# Altium PCB 8_CHANNEL_RELAY_CARD.PcbDoc
Units mm, origin at the board's own origin, x right, y up, seen from the top; angles counter-clockwise.
Board outline 185.55 x 71.9 mm, 2 copper layers (Top Layer, Bottom Layer); 39 components, 51 nets, 138 pads, 0 vias.
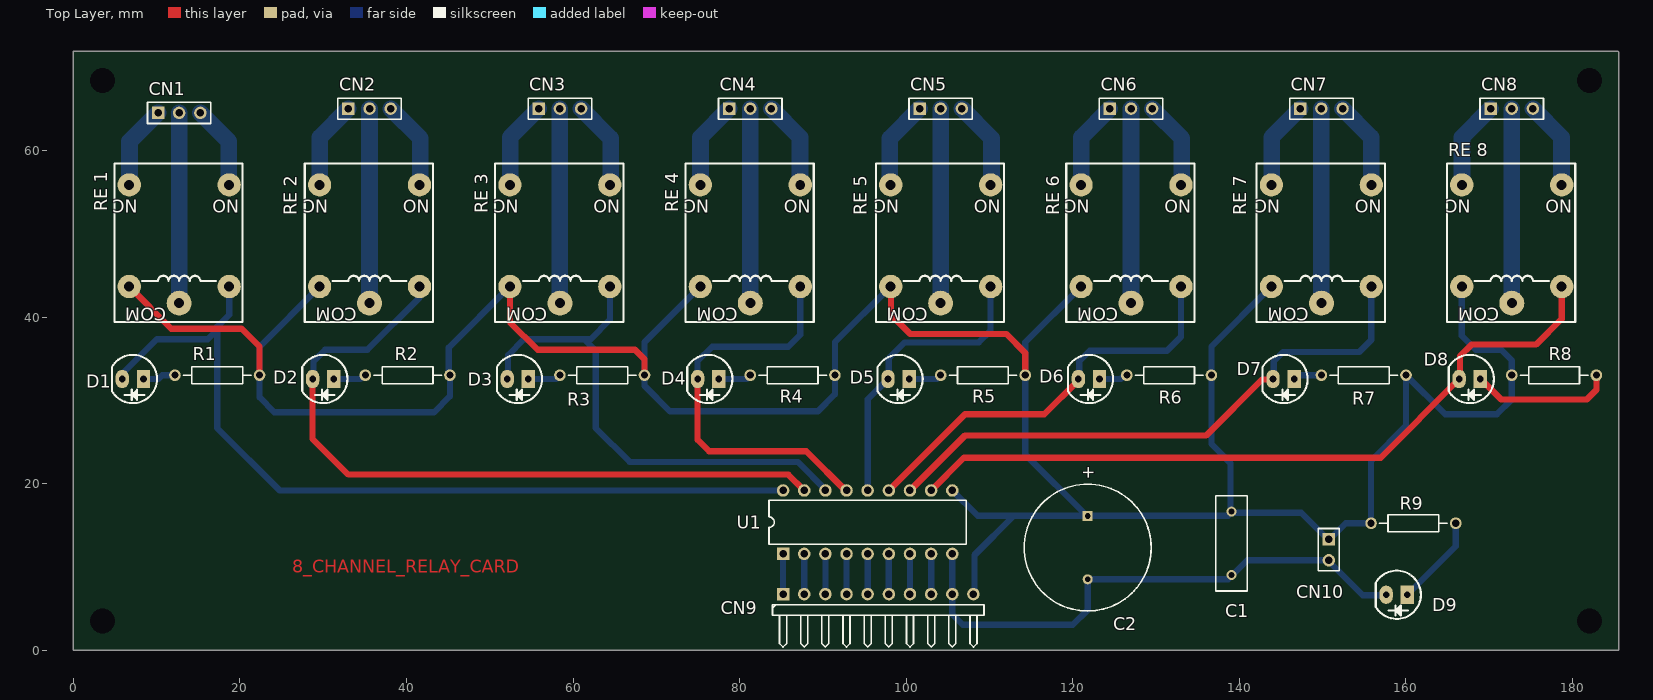
[diagram p0: Top Layer view]
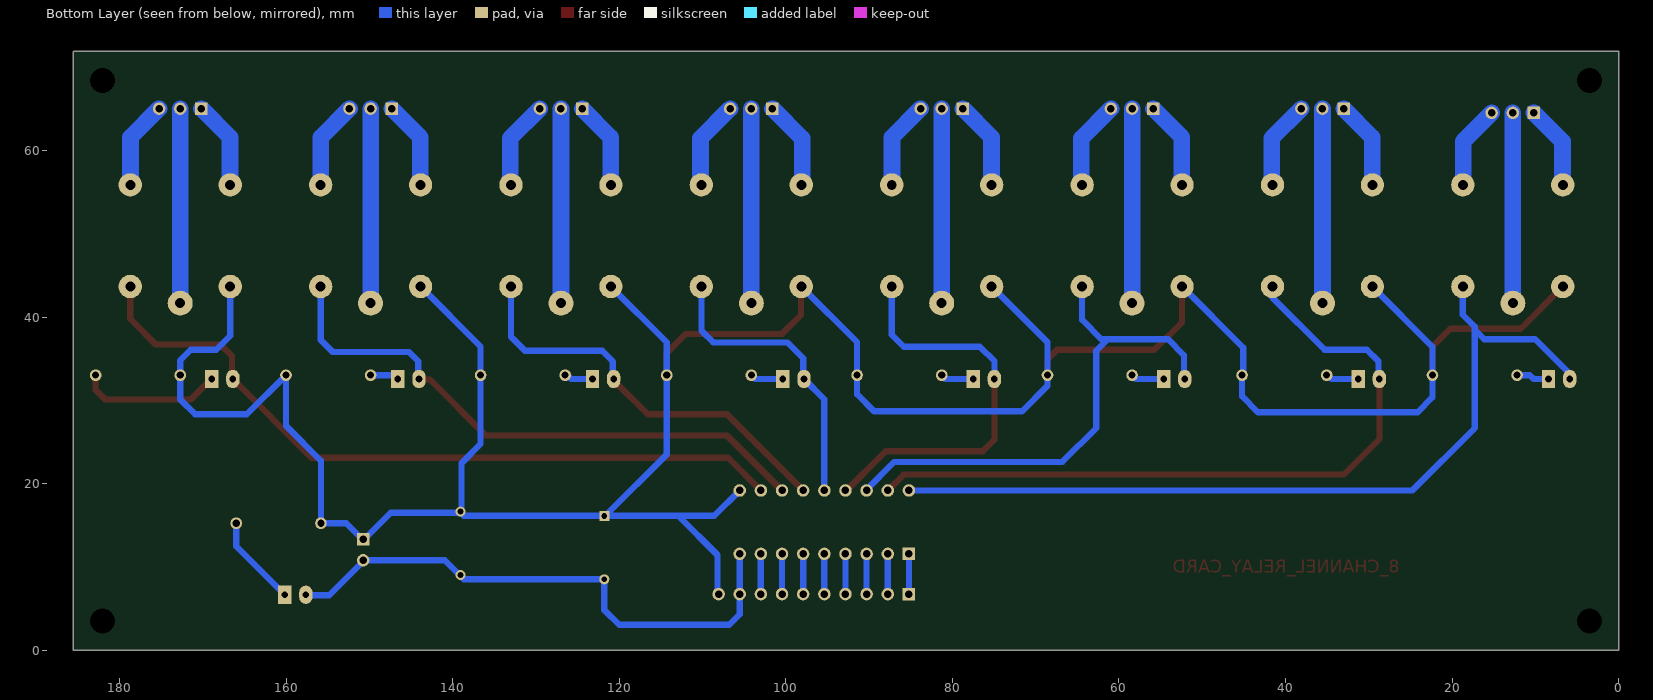
[diagram p1: Bottom Layer view, seen from below]

## Layer stack, top to bottom
Top Layer: signal copper 0.0356
Dielectric: dielectric 0.32, FR-4, Dk 4.8
Bottom Layer: signal copper 0.0356

## Board outline
0,0 0,71.9 185.529,71.9 185.547,71.882 185.547,0

## Design rules (kind name [scope] priority, off if disabled: settings)
Clearance [All] p1: gap=0.254
PolygonConnect [All] p1: connectstyle=Relief reliefconductorwidth=0.254 reliefentries=4 polygonreliefangle="90 Angle"
RoutingVias [All] p1: holewidth=0.711 width=1.27 viastyle="Through Hole" minholewidth=0.711 minwidth=1.27 maxholewidth=0.711 maxwidth=1.27
SilkscreenOverComponentPads [All] p1: minsilkscreentomaskgap=0.254
SolderMaskExpansion [All] p1: expansion=0.102
Width [All] p1: maxlimit=2 minlimit=0.75 preferedwidth=0.75
27 further rules are at their usual default settings.

## Components (designator, comment, footprint, x,y, rotation, side; value= is the part's Value field where it differs from the comment)
C1 "Cap" RAD-0.3 139.065,12.827 r90 top
C2 "Cap Pol1" RB7.6-15 121.793,12.319 r90 top
CN1 "PBT3" HDR1X3 10.16,64.516 r0 top
CN2 "PBT3" HDR1X3 33.02,65.024 r0 top
CN3 "PBT3" HDR1X3 55.88,65.024 r0 top
CN4 "PBT3" HDR1X3 78.74,65.024 r0 top
CN5 "PBT3" HDR1X3 101.6,65.024 r0 top
CN6 "PBT3" HDR1X3 124.46,65.024 r0 top
CN7 "PBT3" HDR1X3 147.32,65.024 r0 top
CN8 "PBT3" HDR1X3 170.18,65.024 r0 top
CN9 "SIP10" HDR1X10H 85.217,6.731 r0 top
CN10 "SUPPLY INPUT" HDR1X2 150.749,13.335 r270 top
D1 "RED LED" 5mm_LED 7.112,32.512 r180 top
D2 "GREEN LED" 5mm_LED 29.972,32.512 r180 top
D3 "RED LED" 5mm_LED 53.34,32.512 r180 top
D4 "GREEN LED" 5mm_LED 76.2,32.512 r180 top
D5 "RED LED" 5mm_LED 99.06,32.512 r180 top
D6 "GREEN LED" 5mm_LED 121.92,32.512 r180 top
D7 "RED LED" 5mm_LED 145.288,32.512 r180 top
D8 "GREEN LED" 5mm_LED 167.64,32.512 r180 top
D9 "RED LED" 5mm_LED 158.877,6.604 r180 top
R1 "1K" "Res 0.25W" 17.272,33.02 r0 top
R2 "1K" "Res 0.25W" 40.132,33.02 r0 top
R3 "1K" "Res 0.25W" 63.5,33.02 r0 top
R4 "1K" "Res 0.25W" 86.36,33.02 r0 top
R5 "1K" "Res 0.25W" 109.22,33.02 r0 top
R6 "1K" "Res 0.25W" 131.572,33.02 r0 top
R7 "1K" "Res 0.25W" 154.94,33.02 r0 top
R8 "1K" "Res 0.25W" 177.8,33.02 r180 top
R9 "1K" "Res 0.25W" 160.909,15.24 r180 top
"RE 1" "12V RELAY" Relay_Sugarcube 12.7,48.768 r180 top
"RE 2" "12V RELAY" Relay_Sugarcube 35.56,48.768 r180 top
"RE 3" "12V RELAY" Relay_Sugarcube 58.42,48.768 r180 top
"RE 4" "12V RELAY" Relay_Sugarcube 81.28,48.768 r180 top
"RE 5" "12V RELAY" Relay_Sugarcube 104.14,48.768 r180 top
"RE 6" "12V RELAY" Relay_Sugarcube 127,48.768 r180 top
"RE 7" "12V RELAY" Relay_Sugarcube 149.86,48.768 r180 top
"RE 8" "12V RELAY" Relay_Sugarcube 172.72,48.768 r180 top
U1 "ULN2803A" A18 95.377,15.367 r0 top

## Footprints (in the part's own frame and the unit in brackets; to place one, negate y for a bottom-side part, rotate by r counter-clockwise, add the part's x,y. Pads: shape width x height; smd on the part's side, far side on the other; paste and mask are expansions set on the pad)
5mm_LED [mm] "5mm_LED"
  rect 1.6x2.2 hole 0.8: 1(-1.295,-0.051)
  oval 1.6x2.2 hole 0.8: 2(1.245,-0.051)
  silkscreen extent -2.93,-2.95 2.5,2.85
A18 [mm] "DIP; 18 Leads; Row Spacing 7.62 mm; Pitch 2.54 mm"
  rect 1.5x1.5 hole 0.9: 1(-10.16,-3.81)
  round 1.5 hole 0.9: 2(-7.62,-3.81) 3(-5.08,-3.81) 4(-2.54,-3.81) 5(0,-3.81) 6(2.54,-3.81) 7(5.08,-3.81) 8(7.62,-3.81) 9(10.16,-3.81) 10(10.16,3.81) 11(7.62,3.81) 12(5.08,3.81) 13(2.54,3.81) 14(0,3.81) 15(-2.54,3.81) 16(-5.08,3.81) 17(-7.62,3.81) 18(-10.16,3.81)
  silkscreen extent -11.85,-2.65 11.85,2.65
HDR1X2 [mm] "Connector; Header; 2 Position"
  rect 1.5x1.5 hole 0.9: 1(0,0)
  round 1.5 hole 0.9: 2(2.54,0)
  silkscreen extent -1.27,-1.27 3.81,1.27
HDR1X3 [mm] "Connector; Header; 3 Position"
  rect 1.5x1.5 hole 0.9: 1(0,0)
  round 1.5 hole 0.9: 2(2.54,0) 3(5.08,0)
  silkscreen extent -1.27,-1.27 6.35,1.27
HDR1X10H [mm] "Connector; Header; 10 Position; Right Angle"
  rect 1.5x1.5 hole 0.9: 1(0,0)
  round 1.5 hole 0.9: 2(2.54,0) 3(5.08,0) 4(7.62,0) 5(10.16,0) 6(12.7,0) 7(15.24,0) 8(17.78,0) 9(20.32,0) 10(22.86,0)
  silkscreen extent -1.27,-6.35 24.13,-1.27
RAD-0.3 [mm] "Radial Cap, Thru-Hole; 2 Leads; 0.3 in Pin Spacing"
  round 1.2 hole 0.7: 1(-3.81,0) 2(3.81,0)
  silkscreen extent -5.71,-1.91 5.71,1.91
RB7.6-15 [mm] "Polarized Capacitor (Radial); 2 Leads"
  rect 1.2x1.2 hole 0.7: 1(3.81,0)
  round 1.2 hole 0.7: 2(-3.81,0)
  silkscreen extent -7.62,-7.62 7.62,7.62
Relay_Sugarcube [mm] "Relay_Sugarcube"
  round 3 hole 1.2: 1(0,7.1)
  round 2.8 hole 1.2: 2(6,-7.1) 3(-6,-7.1) 4(6,5.1) 5(-6,5.1)
  silkscreen extent -7.62,-9.65 7.78,9.35
"Res 0.25W" [mm] "Res 0.25W"
  round 1.4 hole 0.85: 1(-5.08,0) 2(5.08,0)
  silkscreen extent -4.06,-1.02 4.06,1.02

## Part data
C1: "Capacitor"
C2: "Polarized Capacitor (Radial)"
CN1 CN2 CN3 CN4 CN5 CN6 CN7 CN8: library part "Header 3", "Header, 3-Pin"
CN9: library part "Header 10H", "Header, 10-Pin, Right Angle"
CN10: library part "Header 2", "Header, 2-Pin"
D1 D2 D3 D4 D5 D6 D7 D8 D9: library part LED_THT, "LED_THT"
R1 R2 R3 R4 R5 R6 R7 R8 R9: library part Resistor_THT, "Resistor_THT"
"RE 1" "RE 2" "RE 3" "RE 4" "RE 5" "RE 6" "RE 7" "RE 8": library part "Relay Sugacube", "Relay Sugacube"
U1: "High-Voltage, High-Current Darlington Array"

## Free pads (board coordinates)
  round 1.524 hole 3: 0(3.5,3.5) 0(3.5,68.382) 0(182.047,3.5) 0(182.047,68.382)

## Nets (pads, with @x,y where several pads share a name; then routed paths per layer and width w, separated by ;. In a path a pad name is that pad's centre, name@x,y a point inside that pad or via, vN(x,y) a via of type N, cw(c..) or ccw(c..) an arc to the next point about the centre after c; other vN are vias at no path point)
GND: C1.1 C2.2 CN9.9 CN10.2 D9.2 U1.9 | length 66.9
  Bottom Layer w0.75: U1.9 CN9.9 105.537,4.318 106.807,3.048 120.015,3.048 121.793,4.826 C2.2 138.684,8.509 140.97,10.795 150.622,10.795 154.813,6.604 D9.2@157.607,6.604
NetCN1_1: "RE 1.2" CN1.1 | length 10.2
  Bottom Layer w2: 6.731,55.753 6.731,61.087 CN1.1
NetCN1_2: "RE 1.1" CN1.2 | length 22.9
  Bottom Layer w2: 12.7,41.656 12.7,41.668 CN1.2
NetCN2_1: "RE 2.2" CN2.1 | length 10.7
  Bottom Layer w2: 29.591,55.753 29.591,61.595 CN2.1
NetCN2_2: "RE 2.1" CN2.2 | length 23.7
  Bottom Layer w2: CN2.2 35.56,41.668 35.56,41.529 35.687,41.402
NetCN3_1: "RE 3.2" CN3.1 | length 10.8
  Bottom Layer w2: 52.451,55.626 52.451,61.595 CN3.1
NetCN3_2: "RE 3.1" CN3.2 | length 23.4
  Bottom Layer w2: 58.42,41.656 58.42,41.668 CN3.2
NetCN4_1: "RE 4.2" CN4.1 | length 10.7
  Bottom Layer w2: 75.311,55.753 75.311,61.595 CN4.1
NetCN4_2: "RE 4.1" CN4.2 | length 23.6
  Bottom Layer w2: 81.28,41.402 81.28,41.668 CN4.2
NetCN5_1: "RE 5.2" CN5.1 | length 10.6
  Bottom Layer w2: 98.044,55.88 98.044,61.468 CN5.1
NetCN5_2: "RE 5.1" CN5.2 | length 23.5
  Bottom Layer w2: 104.14,41.529 104.14,41.668 CN5.2
NetCN6_1: "RE 6.2" CN6.1 | length 10.6
  Bottom Layer w2: 121.031,55.88 121.031,61.595 CN6.1
NetCN6_2: "RE 6.1" CN6.2 | length 23.7
  Bottom Layer w2: CN6.2 127,41.668 127,41.529 127.127,41.402
NetCN7_1: "RE 7.2" CN7.1 | length 10.7
  Bottom Layer w2: 143.891,55.753 143.891,61.595 CN7.1
NetCN7_2: "RE 7.1" CN7.2 | length 23.7
  Bottom Layer w2: CN7.2 149.86,41.668 149.86,41.529 149.987,41.402
NetCN8_1: "RE 8.2" CN8.1 | length 10.6
  Bottom Layer w2: 166.751,55.88 166.751,61.595 CN8.1
NetCN8_2: "RE 8.1" CN8.2 | length 23.4
  Bottom Layer w2: 172.72,41.656 172.72,41.668 CN8.2
NetCN9_1: CN9.1 U1.1 | length 4.6
  Bottom Layer w0.75: CN9.1@85.217,6.985 U1.1
NetCN9_2: CN9.2 U1.2 | length 4.8
  Bottom Layer w0.75: CN9.2 U1.2
NetCN9_3: CN9.3 U1.3 | length 4.8
  Bottom Layer w0.75: CN9.3 U1.3
NetCN9_4: CN9.4 U1.4 | length 5
  Bottom Layer w0.75: CN9.4@92.837,6.604 CN9.4 U1.4
NetCN9_5: CN9.5 U1.5 | length 4.8
  Bottom Layer w0.75: CN9.5 U1.5
NetCN9_6: CN9.6 U1.6 | length 4.7
  Bottom Layer w0.75: CN9.6@97.917,6.858 U1.6
NetCN9_7: CN9.7 U1.7 | length 4.7
  Bottom Layer w0.75: CN9.7@100.457,6.858 U1.7
NetCN9_8: CN9.8 U1.8 | length 4.7
  Bottom Layer w0.75: CN9.8@102.997,6.858 U1.8
NetD1_1: D1.1 R1.1 | length 4
  Bottom Layer w0.75: D1.1 10.211,32.563 10.668,33.02 R1.1
NetD2_1: D2.1 R2.1 | length 4
  Bottom Layer w0.75: D2.1 34.468,32.563 R2.1@35.052,33.147
NetD3_1: D3.1 R3.1 | length 4
  Bottom Layer w0.75: D3.1 57.963,32.563 R3.1
NetD4_1: D4.1 R4.1 | length 4
  Bottom Layer w0.75: D4.1 80.823,32.563 R4.1
NetD5_1: D5.1 R5.1 | length 4
  Bottom Layer w0.75: D5.1 103.683,32.563 R5.1
NetD6_1: D6.1 R6.1 | length 3.4
  Bottom Layer w0.75: D6.1 125.781,32.563 R6.1@126.365,33.147
NetD7_1: D7.1 R7.1 | length 3.6
  Bottom Layer w0.75: D7.1 147.041,33.02 R7.1 R7.1@149.987,33.02
NetD8_1: D8.1 R8.1 | length 17.5
  Top Layer w0.75: D8.1@168.783,32.766 171.45,30.099 181.737,30.099 182.88,31.242 R8.1
NetD9_1: D9.1 R9.1 | length 11.1
  Bottom Layer w0.75: D9.1 165.989,12.471 R9.1 R9.1@165.989,15.367
OP1: "RE 1.5" D1.2 U1.18 | length 102.9
  Bottom Layer w0.75: D1.2 5.867,33.172 10.033,37.338 16.129,37.338 17.272,38.481 ; 18.7,43.668 18.7,40.29 17.272,38.862 17.272,38.481 ; U1.18 24.765,19.177 17.272,26.67 17.272,38.481
OP2: "RE 2.5" D2.2 U1.17 | length 88.4
  Top Layer w0.75: D2.2@28.702,32.639 28.702,25.4 33.02,21.082 85.852,21.082 U1.17
  Bottom Layer w0.75: D2.2@28.829,32.385 28.829,34.671 30.226,36.068 35.306,36.068 41.56,42.322 41.56,43.668
OP3: "RE 3.5" D3.2 U1.16 | length 62.9
  Bottom Layer w0.75: D3.2@52.197,32.512 52.197,35.433 54.102,37.338 61.341,37.338 ; 64.42,43.668 64.42,39.655 62.103,37.338 61.341,37.338 ; U1.16@90.424,19.177 86.995,22.606 66.802,22.606 62.738,26.67 62.738,35.941 61.341,37.338
OP4: "RE 4.5" D4.2 U1.15 | length 49.3
  Top Layer w0.75: D4.2 74.955,25.248 76.327,23.876 88.011,23.876 U1.15@92.837,19.05
  Bottom Layer w0.75: D4.2@74.93,32.639 74.93,34.671 76.708,36.449 85.852,36.449 87.28,37.877 87.28,43.668
OP5: "RE 5.5" D5.2 U1.14 | length 35.7
  Bottom Layer w0.75: U1.14 95.377,30.124 D5.2 ; D5.2@97.917,32.639 97.917,35.052 99.822,36.957 108.712,36.957 110.14,38.385 110.14,43.668
OP6: "RE 6.5" D6.2 U1.13 | length 50
  Top Layer w0.75: U1.13 107.061,28.321 116.586,28.321 D6.2@120.65,32.385
  Bottom Layer w0.75: D6.2@120.777,32.385 120.777,34.671 122.047,35.941 131.318,35.941 133,37.623 133,43.668
OP7: "RE 7.5" D7.2 U1.12 | length 70.6
  Top Layer w0.75: U1.12 107.061,25.781 136.017,25.781 142.748,32.512 D7.2@144.018,32.512
  Bottom Layer w0.75: D7.2@144.145,32.385 144.145,34.671 145.288,35.814 154.432,35.814 155.86,37.242 155.86,43.668
OP8: "RE 8.5" D8.2 U1.11 | length 89.7
  Top Layer w0.75: U1.11 106.934,23.114 156.972,23.114 D8.2@166.37,32.512 ; D8.2@166.497,32.512 166.497,35.306 167.894,36.703 175.641,36.703 178.72,39.782 178.72,43.668
S1: "RE 1.3" CN1.3 | length 9.9
  Bottom Layer w2: CN1.3 18.669,61.087 18.669,56.007
S2: "RE 2.3" CN2.3 | length 10.7
  Bottom Layer w2: CN2.3 41.656,61.468 41.656,55.753
S3: "RE 3.3" CN3.3 | length 10.6
  Bottom Layer w2: CN3.3 64.516,61.468 64.516,55.88
S4: "RE 4.3" CN4.3 | length 10.4
  Bottom Layer w2: CN4.3 87.249,61.595 87.249,56.007
S5: "RE 5.3" CN5.3 | length 10.7
  Bottom Layer w2: CN5.3 110.236,61.468 110.236,55.753
S6: "RE 6.3" CN6.3 | length 10.7
  Bottom Layer w2: CN6.3 133.096,61.468 133.096,55.753
S7: "RE 7.3" CN7.3 | length 10.6
  Bottom Layer w2: CN7.3 155.829,61.595 155.829,55.88
S8: "RE 8.3" CN8.3 | length 10.7
  Bottom Layer w2: CN8.3 178.689,61.595 178.689,55.753
VCC: "RE 1.4" "RE 2.4" "RE 3.4" "RE 4.4" "RE 5.4" "RE 6.4" "RE 7.4" "RE 8.4" C1.2 C2.1 CN9.10 CN10.1 R1.2 R2.2 R3.2 R4.2 R5.2 R6.2 R7.2 R8.2 R9.2 U1.10 | length 365.2
  Top Layer w0.75: 6.7,43.668 11.76,38.608 20.193,38.608 22.352,36.449 R1.2 ; 52.42,43.668 52.42,39.401 55.753,36.068 67.437,36.068 68.58,34.925 R3.2 ; 98.171,43.434 98.171,40.259 100.457,37.973 112.014,37.973 114.3,35.687 R5.2
  Bottom Layer w0.75: 29.56,43.668 22.352,36.46 R1.2 22.352,30.353 24.13,28.575 43.307,28.575 45.212,30.48 R2.2@45.212,32.639 ; R2.2@45.085,32.893 45.085,36.333 52.42,43.668 ; 75.28,43.668 68.58,36.968 R3.2 68.58,31.75 71.628,28.702 89.408,28.702 91.44,30.734 R4.2 ; R4.2@91.44,33.147 R4.2 ; 98.14,43.668 91.44,36.968 R4.2 ; U1.10 108.585,16.129 112.903,16.129 ; CN9.10@108.204,6.731 108.204,11.43 112.903,16.129 ; 121,43.668 114.3,36.968 R5.2 114.3,23.495 C2.1@121.666,16.129 ; C2.1@121.793,16.002 C2.1@121.666,16.129 ; R6.2@136.652,32.893 R6.2 ; C1.2@138.938,16.51 C1.2@139.065,16.51 ; C1.2@138.938,16.637 138.938,22.479 136.652,24.765 R6.2 ; C1.2@139.192,16.637 C1.2@139.065,16.51 ; 143.86,43.668 136.652,36.46 R6.2 ; 166.72,43.668 166.72,37.75 168.402,36.068 171.45,36.068 172.72,34.798 R8.2 172.72,30.099 170.942,28.321 164.719,28.321 R7.2 160.02,26.924 155.829,22.733 R9.2 152.781,15.24 150.749,13.208 147.447,16.51 C1.2@139.065,16.51 ; 112.903,16.129 C2.1@121.666,16.129 ; C2.1@121.666,16.129 C2.1 138.684,16.129 C1.2@139.065,16.51

## Other copper
Top Layer:
  text "8_CHANNEL_RELAY_CARD" at 26.289,9.271 h1.52

## Silkscreen, mask and mechanical layers (free items; w line width, h text height)
Mechanical 1:
  the board outline again, w0.254

## Text inside footprints (layer, text, board x,y; h text height)
C2: Top Overlay "+" at 122.53,20.451 h1.5 r90
"RE 1": Top Overlay "NO" at 19.939,54.102 h1.52 r180; Top Overlay "NC" at 7.747,54.102 h1.52 r180; Top Overlay "COM" at 11.176,41.148 h1.52 r180
"RE 2": Top Overlay "NO" at 42.799,54.102 h1.52 r180; Top Overlay "NC" at 30.607,54.102 h1.52 r180; Top Overlay "COM" at 34.036,41.148 h1.52 r180
"RE 3": Top Overlay "NO" at 65.659,54.102 h1.52 r180; Top Overlay "NC" at 53.467,54.102 h1.52 r180; Top Overlay "COM" at 56.896,41.148 h1.52 r180
"RE 4": Top Overlay "NO" at 88.519,54.102 h1.52 r180; Top Overlay "NC" at 76.327,54.102 h1.52 r180; Top Overlay "COM" at 79.756,41.148 h1.52 r180
"RE 5": Top Overlay "NO" at 111.379,54.102 h1.52 r180; Top Overlay "NC" at 99.187,54.102 h1.52 r180; Top Overlay "COM" at 102.616,41.148 h1.52 r180
"RE 6": Top Overlay "NO" at 134.239,54.102 h1.52 r180; Top Overlay "NC" at 122.047,54.102 h1.52 r180; Top Overlay "COM" at 125.476,41.148 h1.52 r180
"RE 7": Top Overlay "NO" at 157.099,54.102 h1.52 r180; Top Overlay "NC" at 144.907,54.102 h1.52 r180; Top Overlay "COM" at 148.336,41.148 h1.52 r180
"RE 8": Top Overlay "NO" at 179.959,54.102 h1.52 r180; Top Overlay "NC" at 167.767,54.102 h1.52 r180; Top Overlay "COM" at 171.196,41.148 h1.52 r180